# Altium PCB PCB1.PcbDoc
Units mm, origin at the board's own origin, x right, y up, seen from the top; angles counter-clockwise.
Board outline 51 x 41 mm, 2 copper layers (Top Layer, Bottom Layer); 30 components, 25 nets, 98 pads, 0 vias.
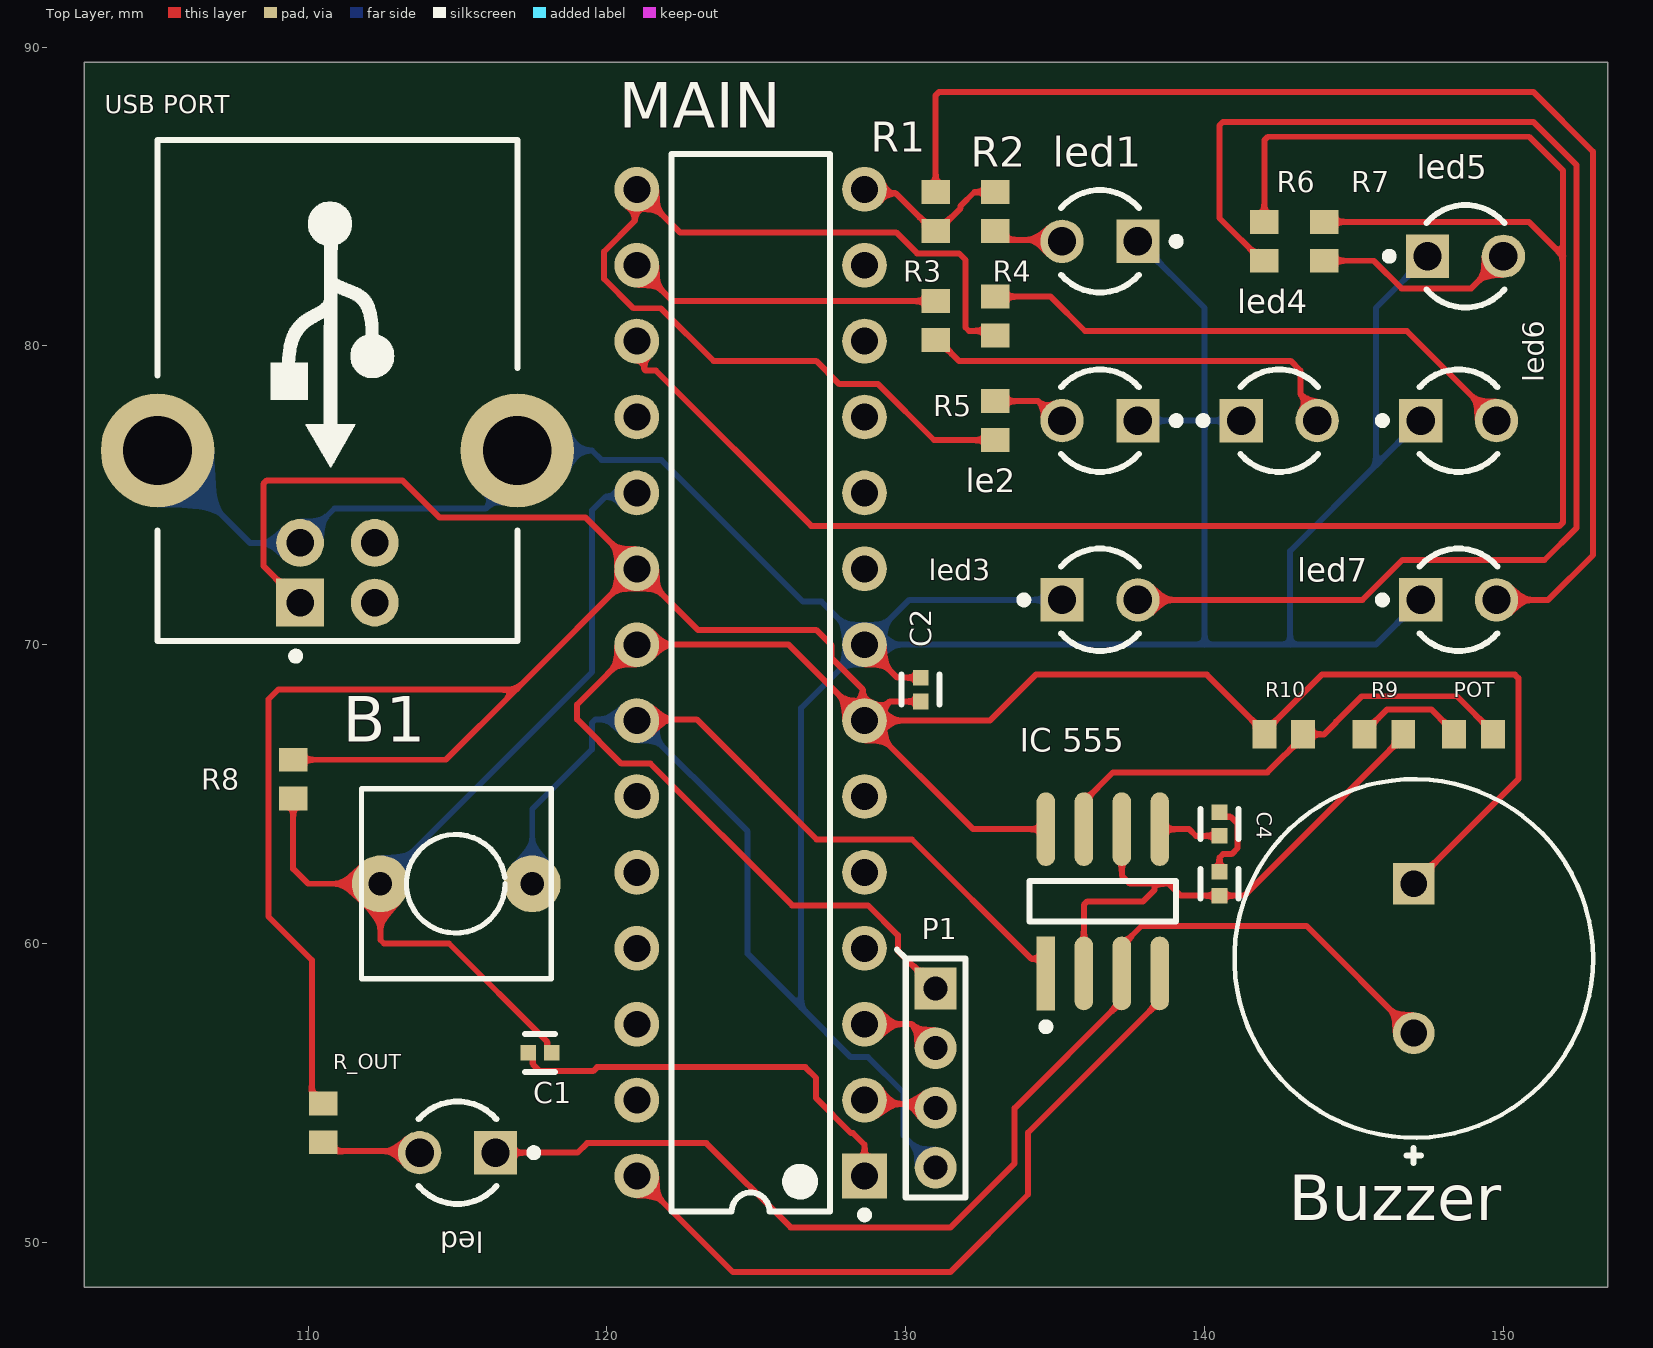
[diagram p0: Top Layer view]
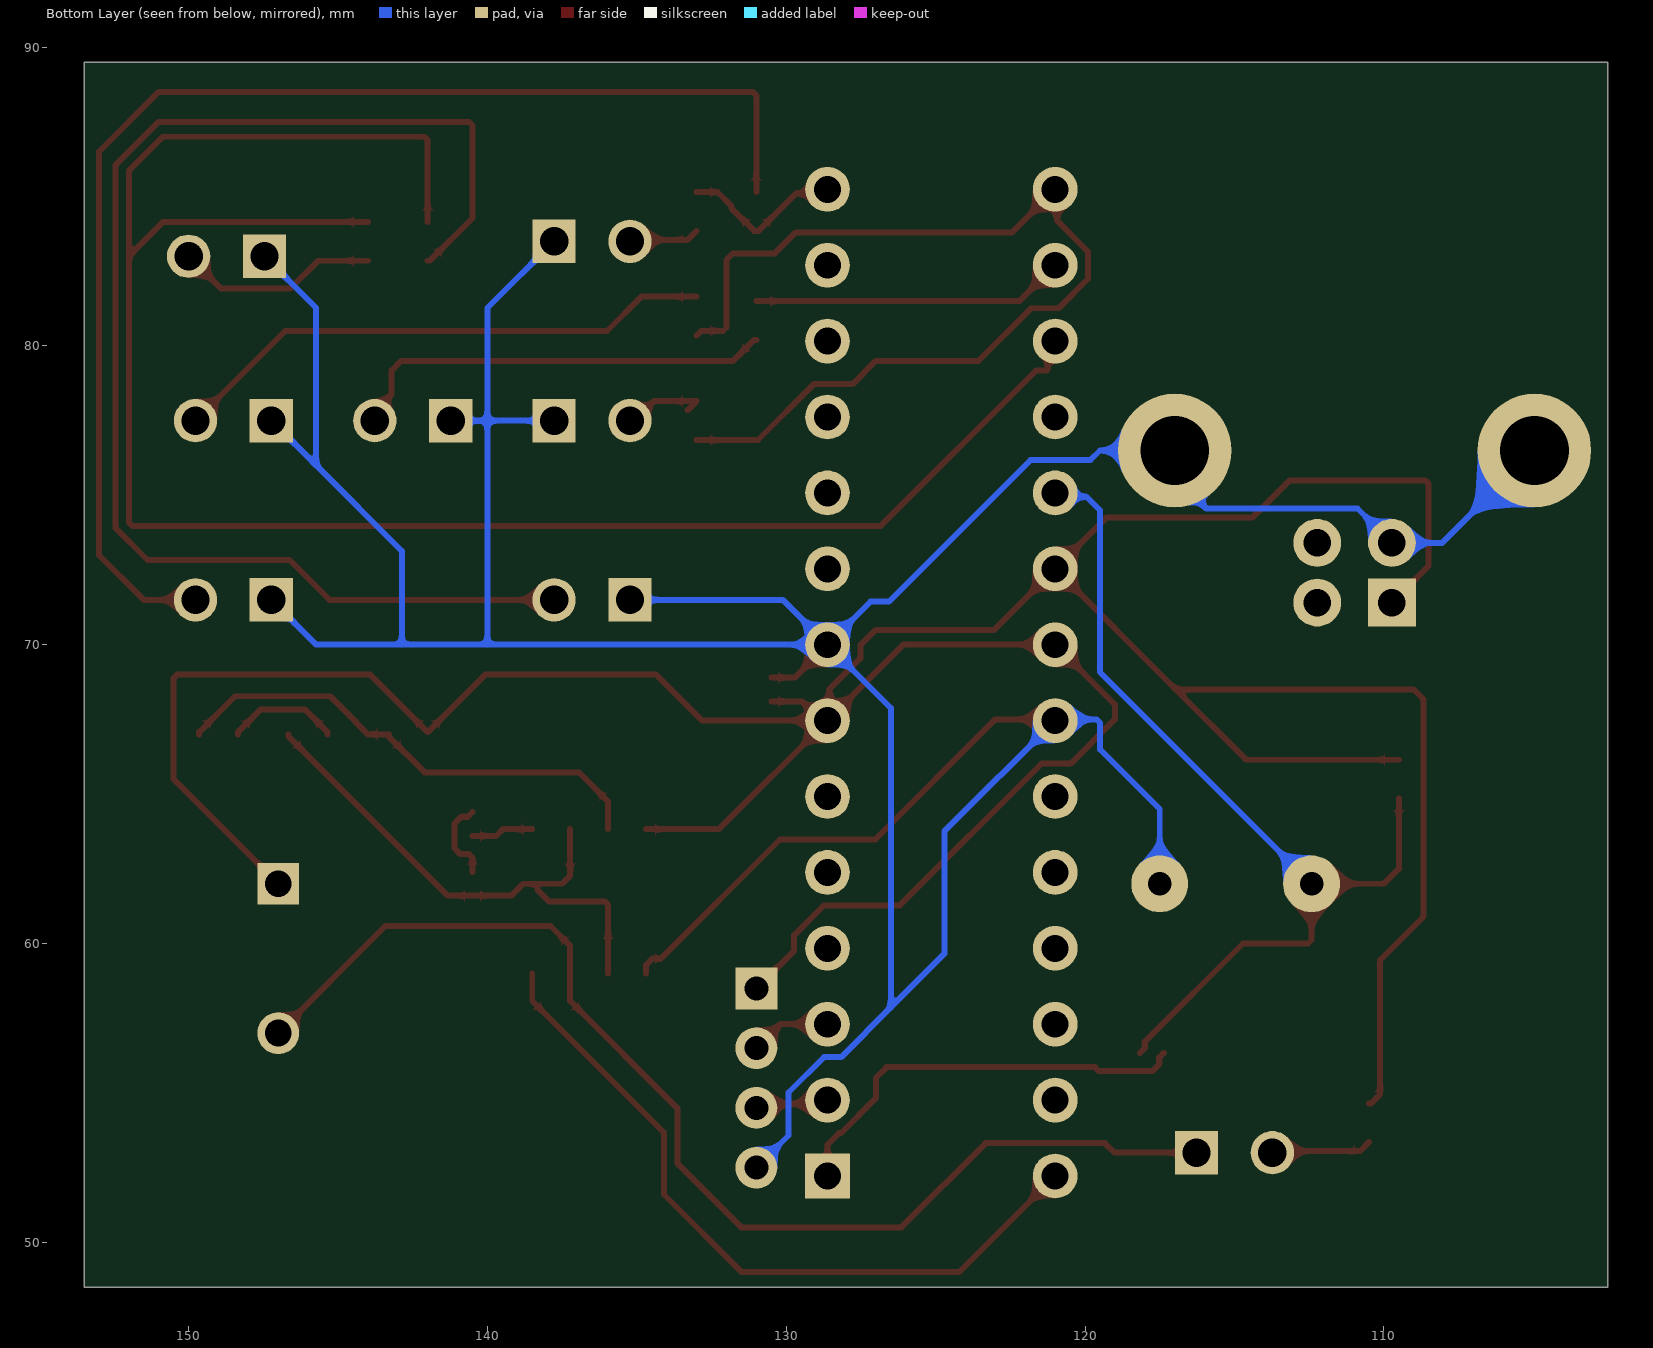
[diagram p1: Bottom Layer view, seen from below]
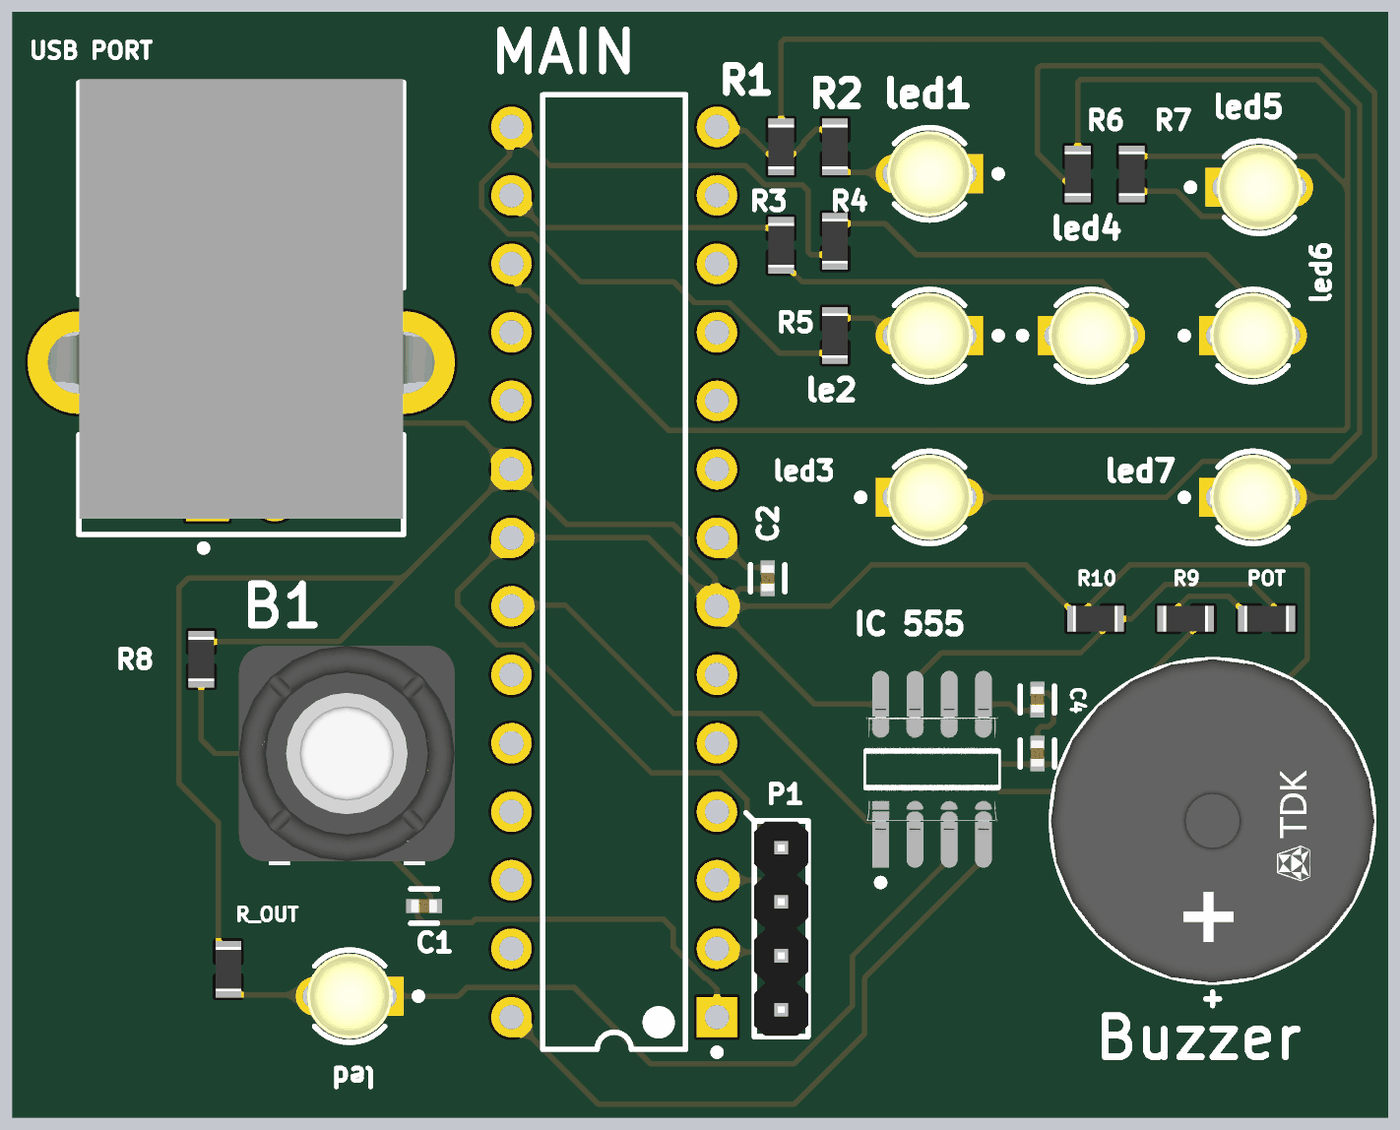
[diagram p2: 3D render of the assembled board from above, using the file's embedded part models]

## Layer stack, top to bottom
Top Solder: solder mask 0.0102, Solder Resist, Dk 3.5
Top Layer: signal copper 0.0356
Dielectric 1: dielectric 0.32, FR-4, Dk 4.8
Bottom Layer: signal copper 0.0356
Bottom Solder: solder mask 0.0102, Solder Resist, Dk 3.5

## Board outline
102.5,48.5 102.5,89.5 153.5,89.5 153.5,48.5

## Design rules (kind name [scope] priority, off if disabled: settings)
Clearance [All] p1: gap=0.25 ignorepadtopadclearanceinfootprint=FALSE
PolygonConnect [All] p1: connectstyle=Relief reliefconductorwidth=0.254 reliefentries=4 polygonreliefangle="90 Angle" airgapwidth=0.254
RoutingVias [All] p1: holewidth=0.4 width=0.5 viastyle="Through Hole" minholewidth=0.4 minwidth=0.5 maxholewidth=0.4 maxwidth=0.5
SolderMaskExpansion [All] p1: expansion=0.102 istentingtop=FALSE
Width [All] p1: maxlimit=0.3 minlimit=0.2 preferedwidth=0.3
30 further rules are at their usual default settings.

## Components (designator, comment, footprint, x,y, rotation, side; value= is the part's Value field where it differs from the comment)
B1 "" SW2 112.42,62 r0 top value="SW chip 2 pin"
Buzzer "BUZZER" FP-SD1209-MFG 147,59.5 r270 top
C1 "100nF" FP-C0402-BB-MFG 117.76,56.34 r0 top value="0.10 μF"
C2 "100nF" FP-C0402-BB-MFG 130.5,68.5 r270 top value="0.10 μF"
C3 "10uF" FP-C0402-BB-MFG 140.5,62 r270 top value="0.10 μF"
C4 "0.01uF" FP-C0402-BB-MFG 140.5,64 r90 top value="0.10 μF"
"IC 555" "NE555DR" FP-D0008A-IPC_A 136.595,61.414 r90 top (schematic designator U?)
le2 "" FP-HLMP-1719-MFG 136.5,77.5 r180 top
led "" FP-HLMP-1719-MFG 115,53 r180 top
led1 "" FP-HLMP-1719-MFG 136.5,83.5 r180 top
led3 "" FP-HLMP-1719-MFG 136.5,71.5 r0 top
led4 "" FP-HLMP-1719-MFG 142.5,77.5 r0 top
led5 "" FP-HLMP-1719-MFG 148.73,83 r0 top
led6 "" FP-HLMP-1719-MFG 148.5,77.5 r0 top
led7 "" FP-HLMP-1719-MFG 148.5,71.5 r0 top
MAIN "ATmega328P-PU" 28P3 124.81,68.73 r180 top
P1 "Header 4" HDR/Header/4/2mm 131,55.5 r270 top
POT "100K" RESC1609X50X30NL8T20 149,67 r180 top
R1 "220" RESC1609X50X30NL8T20 131,84.5 r90 top
R2 "220" RESC1609X50X30NL8T20 133,84.5 r270 top
R3 "220" RESC1609X50X30NL8T20 131,80.85 r270 top
R4 "220" RESC1609X50X30NL8T20 133,81 r90 top
R5 "220" RESC1609X50X30NL8T20 133,77.5 r90 top
R6 "220" RESC1609X50X30NL8T20 142,83.5 r270 top
R7 "220" RESC1609X50X30NL8T20 144,83.5 r270 top
R8 "4.7K" RESC1609X50X30NL8T20 109.5,65.5 r90 top
R9 "1K" RESC1609X50X30NL8T20 146,67 r0 top
R10 "10K" RESC1609X50X30NL8T20 142.65,67 r180 top
R_OUT "470" RESC1609X50X30NL8T20 110.5,54 r270 top
"USB PORT" "USB-B Through-Hole" USB2.5-2H4D 110.98,73.955 r180 top

## Footprints (in the part's own frame and the unit in brackets; to place one, negate y for a bottom-side part, rotate by r counter-clockwise, add the part's x,y. Pads: shape width x height; smd on the part's side, far side on the other; paste and mask are expansions set on the pad)
28P3 [mm] "28-Pin Plastic Dual In-Line Package (PDIP)"
  rect 1.5x1.5 hole 0.9: 1(-3.81,16.51)
  round 1.5 hole 0.9: 2(-3.81,13.97) 3(-3.81,11.43) 4(-3.81,8.89) 5(-3.81,6.35) 6(-3.81,3.81) 7(-3.81,1.27) 8(-3.81,-1.27) 9(-3.81,-3.81) 10(-3.81,-6.35) 11(-3.81,-8.89) 12(-3.81,-11.43) 13(-3.81,-13.97) 14(-3.81,-16.51) 15(3.81,-16.51) 16(3.81,-13.97) 17(3.81,-11.43) 18(3.81,-8.89) 19(3.81,-6.35) 20(3.81,-3.81) 21(3.81,-1.27) 22(3.81,1.27) 23(3.81,3.81) 24(3.81,6.35) 25(3.81,8.89) 26(3.81,11.43) 27(3.81,13.97) 28(3.81,16.51)
  silkscreen extent -3.94,-17.7 2.65,17.93, body extent -3.6,-17.65 3.6,17.65, height 4.58
FP-C0402-BB-MFG [mm]
  rect 0.52x0.52 smd paste+0 mask+0: 1(-0.4,0) 2(0.4,0)
  silkscreen extent -0.5,-0.64 0.5,0.64, body extent -0.8,-0.4 0.8,0.4, height 0.25
FP-D0008A-IPC_A [mm]
  rect 2.469x0.622 smd paste+0 mask+0: 1(-2.414,1.905)
  rrect100% 2.469x0.622 smd paste+0 mask+0: 2(-2.414,0.635) 3(-2.414,-0.635) 4(-2.414,-1.905) 5(2.414,-1.905) 6(2.414,-0.635) 7(2.414,0.635) 8(2.414,1.905)
  silkscreen extent -4.32,-2.45 0.68,2.45, body extent -4.15,-2.95 4.15,2.95, height 0.25
FP-HLMP-1719-MFG [mm]
  rect 1.45x1.45 hole 0.95 paste-1000 mask+0: 1(-1.27,0)
  round 1.45 hole 0.95 paste-1000 mask+0: 2(1.27,0)
  silkscreen extent -2.68,-1.71 1.3,1.71, body extent -2.22,-2.22 2.22,2.22, height 0.25
FP-SD1209-MFG [mm]
  rect 1.4x1.4 hole 0.9 paste-1000 mask+0: 1(-2.5,0)
  round 1.4 hole 0.9 paste-1000 mask+0: 2(2.5,0)
  silkscreen extent -6,-6 6.85,6, body extent -6.1,-6.1 6.1,6.1, height 0.25
HDR/Header/4/2mm [mm]
  rect 1.4x1.4 hole 0.8: 1(-3,0)
  round 1.4 hole 0.8: 2(-1,0) 3(1,0) 4(3,0)
  silkscreen extent -4.3,-1.3 4,1, body extent -3.98,-1 3.97,1, height 6
RESC1609X50X30NL8T20 [mm] "Chip Resistor, 2-Leads, Body 1.65x0.95mm, IPC Medium Density"
  rect 0.8x0.95 smd: 1(-0.65,0) 2(0.65,0)
  body extent -0.82,-0.48 0.82,0.48, height 0.5
SW2 [mil] "SW button 2pin, 250x 250 mil"
  round 75 hole 31: 1(0,0) 2(200,0)
  silkscreen extent -25,-125 225,125, body extent -60,-163 255,157, height 257
USB2.5-2H4D [mm] "Connector; USB1.1, Type B, Thru-Hole; 4 Position; Right Angle"
  rect 1.6x1.6 hole 0.92: 1(1.25,2.546)
  round 1.6 hole 0.92: 2(-1.25,2.546) 3(-1.25,0.546) 4(1.25,0.546)
  round 3.8 hole 2.3: 5(6.02,-2.545) 6(-6.02,-2.545)
  silkscreen extent -6.02,-12.93 6.02,4.46, body extent -7.43,-13.06 7.43,3.24, height 10.58

## Part data
B1: library part SW2, "Switch button 2 pin"
Buzzer: library part CMP-08413-000009-1, "AUDIO MAGNETIC XDCR 3-6V TH", Current Rating=60mA, Frequency=2.048kHz, Max Operating Temperature=85°C, Min Operating Temperature=-40°C, Operating Supply Voltage=5V, Package Quantity=100, Self Resonant Frequency=2.05kHz, Diameter=12mm, Height=9mm, Lead Free="Lead Free", Max Supply Current=60mA, Mount="Through Hole", Number of Pins=2, Number of Terminals/Pins=2, Operating Supply Current=60mA, Packaging=Tray, Sensing Method=Magnetic, Series=SD, Termination="PC Pins", Voltage Rating (DC)=5V, Washable=No
C1 C2 C3 C4: library part CMP-2008-02046-2, "CAP CER 0.1UF 10V X5R 0402", Capacitance="0.10 μF", Manufacturer=Kemet, Manufacturer Part Number=C0402C104K8PACTU, Package=C0402-BB, Temperature="-55°C to +125°C", Temperature Characteristic=X5R, Temperature Coefficient=15%, Temperature Range High=+125°C, Temperature Range Low=-55°C, Tolerance=0.1, Voltage Rating="10 V", Automotive=No, Category=Cap, ComponentLink2Description=Datasheet, ComponentLink2URL=https://content.kemet.com/datasheets/KEM_C1002_X7R_SMD.pdf, Device Class L1="Passive Components", Device Class L2=Capacitors, Device Class L3="Ceramic Capacitors", Digikey Description="CAP CER 0.1UF 10V X5R 0402", Height=0.55mm, Ipc Land Pattern Name=CAPC10050X50, Lead Free=Yes, Material=Ceramic, Mouser Description="Capacitor 100 nF 10 VDC 0402", Octopart=https://octopart.com/c0402c104k8pactu-kemet-140039, RoHS=TRUE
"IC 555": library part CMP-1685-00007-2, "IC OSC SGL TIMER 100KHZ 8-SOIC", Case/Package=SOIC, Frequency=100kHz, High Level Output Current=-200mA, Low Level Output Current=200mA, Max Operating Temperature=70°C, Max Supply Voltage=16V, Min Operating Temperature=0°C, Min Supply Voltage=4.5V, Operating Supply Current=10mA, Package Quantity=2500, Quiescent Current=15mA, Contact Plating=Gold, Height=1.58mm, Lead Free="Lead Free", Length=4.9mm, Mount="Surface Mount", Number of Pins=8, Number of Timers/Counters=1, Packaging="Tape and Reel", Radiation Hardening=No, REACH SVHC="No SVHC", Weight=0.002561oz, Width=3.91mm
le2 led led1 led3 led4 led5 led6 led7: library part CMP-2000-06410-2, "LED YELLOW DIFFUSED T-1 T/H", Colour=Yellow, Forward Current=2mA, Forward Voltage=1.8V, Manufacturer=Broadcom, Manufacturer Part Number=HLMP-1719, Package=0, Power Dissipation=17.5mW, Reverse Voltage=5V, Temperature="-40°C to +100°C", Temperature Range High=+100°C, Temperature Range Low=-40°C, Automotive=No, Category=Diode, ComponentLink2Description=Datasheet, ComponentLink2URL=https://docs.broadcom.com/docs/AV02-1557EN, Device Class L1=Optoelectronics, Device Class L2=LEDs, Device Class L3=unset, Digikey Description="LED YELLOW DIFFUSED T-1 T/H", Lead Free=Yes, Led Orientation=Straight, Luminous Intensity=2.1mcd, Mouser Description="Standard LEDs - Through Hole Yellow Diffused 585nm 2.1mcd", Octopart=https://octopart.com/hlmp-1719-broadcom-71130405, RoHS=TRUE, Viewing Angle=50°, Wavelength=585nm
MAIN: library part CMP-0095-00013-2, "8-bit AVR Microcontroller, 32KB Flash, 1KB EEPROM, 2KB SRAM, 28-pin PDIP, Industrial Grade (-40°C to 85°C)", ComponentLink1Description="Manufacturer URL", ComponentLink1URL=http://www.atmel.com/, ComponentLink2Description="ATmega48A/48PA/88A/88PA/168A/168PA/328/328P Datasheet", ComponentLink2URL=http://www.atmel.com/dyn/resources/prod_documents/8271.pdf, ComponentLink3Description="ATmega48A/48PA/88A/88PA/168A/168PA/328/328P Summary", ComponentLink3URL=http://www.atmel.com/dyn/resources/prod_documents/8271S.pdf, DatasheetVersion="revD, May-2011", PackageDescription="28-lead (0.300\"/7.62mm Wide) Plastic Dual Inline Package (PDIP)", PackageReference=28P3, PackageVersion="revB, Sep-2001", RevisionNote="DatasheetVersion updated. URLs added."
P1: "Header, 4-Pin"
POT R1 R2 R3 R4 R5 R6 R7 R8 R9 R10 R_OUT: library part CMP-1666-00005-4, "Chip Resistor, 10 KOhm, +/- 1%, 100 mW, -55 to 155 degC, 0603 (1608 Metric), RoHS, Tape and Reel", Manufacturer="Vishay Semiconductor", Max Operating Temperature="155 degC", Min Operating Temperature="-55 degC", Package Quantity=5000, Voltage Rating="75 V", ComponentLink1Description="Manufacturer URL", ComponentLink1URL=http://www.vishay.com/, ComponentLink2Description=Datasheet, ComponentLink2URL=https://datasheet.ciiva.com/11809/0900766b80d98afc-11809037.pdf, DatasheetVersion=06/2012, Height="0.45 mm", Length="1.55 mm", Mounting Technology="Surface Mount", PackageDescription="2-Pin Surface Mount Device, Body 1.575 x 0.85 mm", PackageReference=0603, Packaging="Tape and Reel", REACH SVHC=Unknown, RoHSCompliant=true
"USB PORT": library part "USB-B TH"

## Nets (pads, with @x,y where several pads share a name; then routed paths per layer and width w, separated by ;. In a path a pad name is that pad's centre, name@x,y a point inside that pad or via, vN(x,y) a via of type N, cw(c..) or ccw(c..) an arc to the next point about the centre after c; other vN are vias at no path point)
DISCH: "IC 555.7" POT.1 R10.1 | length 16.7
  Top Layer w0.2: 135.96,63.827 135.96,64.751 136.938,65.728 142.103,65.728 143.3,66.925 R10.1 144,67 144.403,67.403 144.403,67.422 145.255,68.275 148.45,68.275 149.65,67.075 POT.1
GND: "IC 555.1" "USB PORT.4" "USB PORT.5" "USB PORT.6" B1.2 C2.1 le2.1 led1.1 led3.1 led4.1 led5.1 led6.1 led7.1 MAIN.8 MAIN.22 P1.4 | length 150.8
  Top Layer w0.2: MAIN.22 121.04,67.5 123,67.5 127.02,63.48 130.21,63.48 134.196,59.494 134.479,59.494 134.69,59.283 134.69,59 ; MAIN.8 129.72,68.9 C2.1
  Bottom Layer w0.2: 104.96,76.5 108.051,73.409 109.73,73.409 110.88,74.559 115.941,74.559 117,75.618 117,76.5 119.5,76.5 119.82,76.18 121.82,76.18 126.56,71.44 127.18,71.44 MAIN.8 ; B1.2 117.5,64.5 119.5,66.5 119.5,67.383 119.617,67.5 120.96,67.5 MAIN.22 124.707,63.753 124.707,59.658 126.5,57.864 ; P1.4 129.923,53.577 129.923,55.013 128.736,56.2 128.164,56.2 126.5,57.864 ; led3.1 130.12,71.5 MAIN.8 ; le2.1 140,77.5 ; led1.1 140,81.27 140,77.5 ; led4.1 140,77.5 ; led7.1 145.73,70 142.865,70 ; led6.1 145.73,76 ; led5.1 145.73,81.27 145.73,76 ; 126.5,57.864 126.5,67.88 MAIN.8 ; MAIN.8 140,70 ; 140,70 142.865,70 ; 140,70 140,77.5 ; 142.865,70 142.865,73.135 145.73,76
GROUP_1: MAIN.14 R1.1 R2.1 | length 5.5
  Top Layer w0.2: MAIN.14 128.755,85.105 129.67,85.105 130.925,83.85 R1.1 131.075,83.85 131.838,84.613 131.838,84.688 132.3,85.15 R2.1
GROUP_2: MAIN.15 R4.1 R5.1 | length 34.1
  Top Layer w0.2: R5.1 130.946,76.85 129.076,78.72 127.78,78.72 127,79.5 123.564,79.5 121.804,81.26 120.884,81.26 119.9,82.244 119.9,83.156 120.934,84.19 120.934,85.174 MAIN.15 122.44,83.8 129.68,83.8 130.38,83.1 131.783,83.1 132,82.883 132,80.617 132.117,80.5 132.85,80.5 R4.1
GROUP_3: MAIN.17 R6.1 R7.1 | length 67.5
  Top Layer w0.2: MAIN.17 121.249,79.911 121.249,79.214 121.293,79.17 121.642,79.17 126.832,73.98 151.883,73.98 152,74.097 152,83 ; R6.1 142,86.883 142.117,87 150.864,87 152,85.864 152,83 ; R7.1 150.85,84.15 152,83
IN: B1.1 C1.2 MAIN.19 R8.1 | length 32
  Top Layer w0.2: R8.1 109.5,62.5 110,62 B1.1 112.42,60.117 112.537,60 114.715,60 118,56.715 118,56.5 C1.2
  Bottom Layer w0.2: B1.1 119.5,69.08 119.5,74.5 119.95,74.95 120.87,74.95 MAIN.19
LED_4: MAIN.16 R3.1 | length 10.5
  Top Layer w0.2: MAIN.16 122.2,81.5 R3.1
Net_2: "IC 555.3" Buzzer.2 led.1 | length 39.9
  Top Layer w0.2: led.1 119.015,53 119.335,53.32 123.325,53.32 126.145,50.5 131.5,50.5 133.642,52.642 133.642,54.489 137.23,58.076 137.23,59 137.23,59.924 137.891,60.585 143.415,60.585 Buzzer.2
NetC1_1: C1.1 MAIN.1 | length 14.2
  Top Layer w0.2: C1.1 117.52,56.18 117.52,55.965 117.755,55.73 119.54,55.73 119.67,55.86 126.64,55.86 127,55.5 127,54.824 128.164,53.66 128.23,53.66 128.62,53.27 MAIN.1
NetC3_1: C3.1 C4.2 | length 2.8
  Top Layer w0.2: C3.1 140.5,62.873 140.617,62.99 140.905,62.99 141.11,63.195 141.11,64.005 140.875,64.24 140.66,64.24 C4.2
NetC4_1: "IC 555.5" C4.1 | length 2.1
  Top Layer w0.2: 138.5,63.827 139.484,63.827 139.711,63.6 C4.1
Netle2_2: le2.2 R5.2 | length 2.9
  Top Layer w0.2: R5.2@133.3,77.85 R5.2 134.43,78.15 135.08,77.5 le2.2
Netled1_2: led1.2 R2.2 | length 2.4
  Top Layer w0.2: R2.2 133.3,83.55 135.18,83.55 led1.2
Netled3_2: led3.2 R6.2 | length 45.6
  Top Layer w0.2: led3.2 145.285,71.5 146.62,72.835 151.374,72.835 152.45,73.911 152.45,86.05 151,87.5 140.617,87.5 140.5,87.383 140.5,84.275 141.925,82.85 R6.2
Netled4_2: led4.2 R3.2 | length 14.5
  Top Layer w0.2: R3.2 131.075,80.2 131.775,79.5 142.883,79.5 143.207,79.176 143.207,78.386 143.77,77.823 led4.2
Netled5_2: led5.2 R7.2 | length 6.8
  Top Layer w0.2: R7.2 145.665,82.85 146.59,81.925 148.925,81.925 led5.2
Netled6_2: led6.2 R4.2 | length 18.5
  Top Layer w0.2: R4.2 134.85,81.65 136,80.5 146.77,80.5 led6.2
Netled7_2: led7.2 R1.2 | length 43.5
  Top Layer w0.2: R1.2 131,88.383 131.117,88.5 151,88.5 153,86.5 153,73 151.5,71.5 led7.2
Netled_2: led.2 R_OUT.2 | length 3.4
  Top Layer w0.2: R_OUT.2 110.8,53.05 113.68,53.05 led.2
NetPOT_2: POT.2 R9.1 | length 3.8
  Top Layer w0.2: R9.1 145.35,67.075 146.1,67.825 147.6,67.825 148.35,67.075 POT.2
RST_BUZZER: "IC 555.4" MAIN.28 | length 24.7
  Top Layer w0.2: MAIN.28 124.22,49 131.491,49 134.092,51.601 134.092,53.669 138.5,58.076 138.5,59
RXD: MAIN.2 P1.3 | length 2.5
  Top Layer w0.2: MAIN.2 128.75,54.63 130.87,54.63 P1.3
TRIG: "IC 555.2" "IC 555.6" C3.2 R9.2 | length 18.6
  Top Layer w0.2: 135.96,59 135.96,61.296 136.077,61.414 137.945,61.414 138.328,61.796 138.328,61.91 138.417,62 ; 137.23,63.827 137.23,62.27 137.5,62 138.417,62 ; R9.2 146.65,66.925 141.325,61.6 C3.2 139.2,61.6 138.8,62 138.417,62
TXD: MAIN.3 P1.2 | length 2.7
  Top Layer w0.2: MAIN.3 130.2,57.3 P1.2
VCC: "IC 555.8" "USB PORT.1" Buzzer.1 C2.2 MAIN.7 MAIN.20 MAIN.21 P1.1 R8.2 R10.2 R_OUT.1 | length 135.7
  Top Layer w0.2: R8.2 114.61,66.15 116.96,68.5 ; 109.73,71.409 108.5,72.639 108.5,75.383 108.617,75.5 113.153,75.5 114.403,74.25 119.29,74.25 MAIN.20 ; R_OUT.1 110.425,54.65 110.125,54.95 110.125,59.447 108.675,60.897 108.675,68.175 109,68.5 116.96,68.5 ; C2.2 129.465,68.1 MAIN.7@128.825,67.46 ; P1.1 129.738,59.762 129.738,60.278 128.736,61.28 126.196,61.28 121.456,66.02 120.48,66.02 119,67.5 119,68 MAIN.21 126.08,70 MAIN.7@128.554,67.526 ; 134.69,63.827 132.253,63.827 MAIN.7 ; Buzzer.1 150.5,65.5 150.5,68.883 150.383,69 143.925,69 142,67.075 140.075,69 134.353,69 132.813,67.46 MAIN.7@128.825,67.46 ; 116.96,68.5 MAIN.20 ; MAIN.20 123.04,70.5 127,70.5 127.52,69.98 127.52,69.544 128.554,68.51 MAIN.7@128.554,67.526 ; MAIN.7@128.554,67.526 MAIN.7 ; MAIN.7 MAIN.7@128.825,67.46
pads on no net: "USB PORT.2" "USB PORT.3" MAIN.4 MAIN.5 MAIN.6 MAIN.9 MAIN.10 MAIN.11 MAIN.12 MAIN.13 MAIN.18 MAIN.23 MAIN.24 MAIN.25 MAIN.26 MAIN.27

## Silkscreen, mask and mechanical layers (free items; w line width, h text height)
Mechanical 1:
  the board outline again, w0.254